# Altium PCB PCB1.PcbDoc
Units mil, origin at the board's own origin, x right, y up, seen from the top; angles counter-clockwise.
Board outline 1455.02 x 1421.26 mil, 2 copper layers (Top Layer, Bottom Layer); 13 components, 7 nets, 33 pads, 36 vias.
Unrouted connection lines stored in the file: 2.
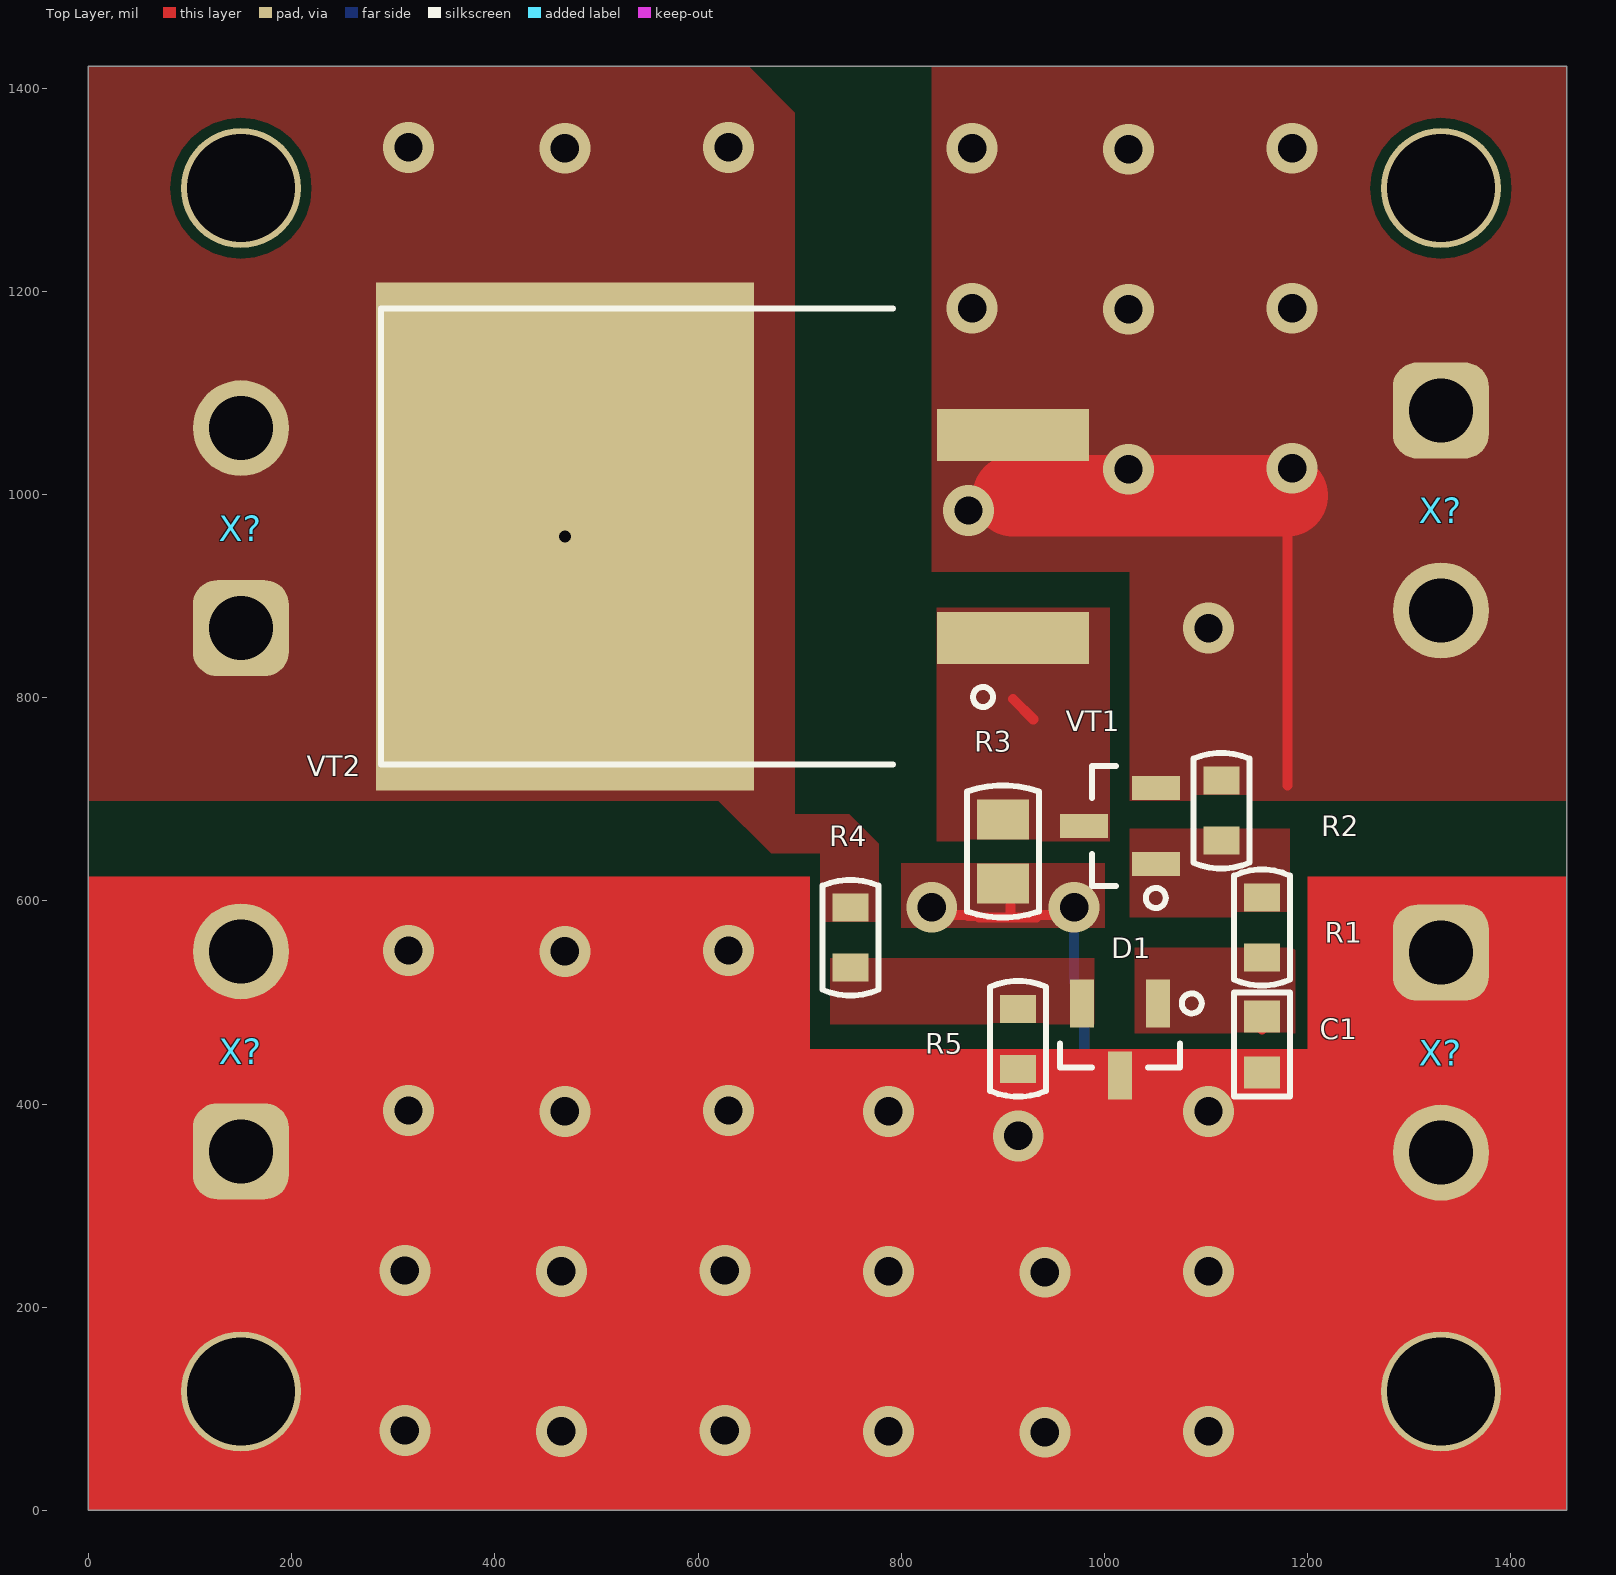
[diagram p0: Top Layer view]
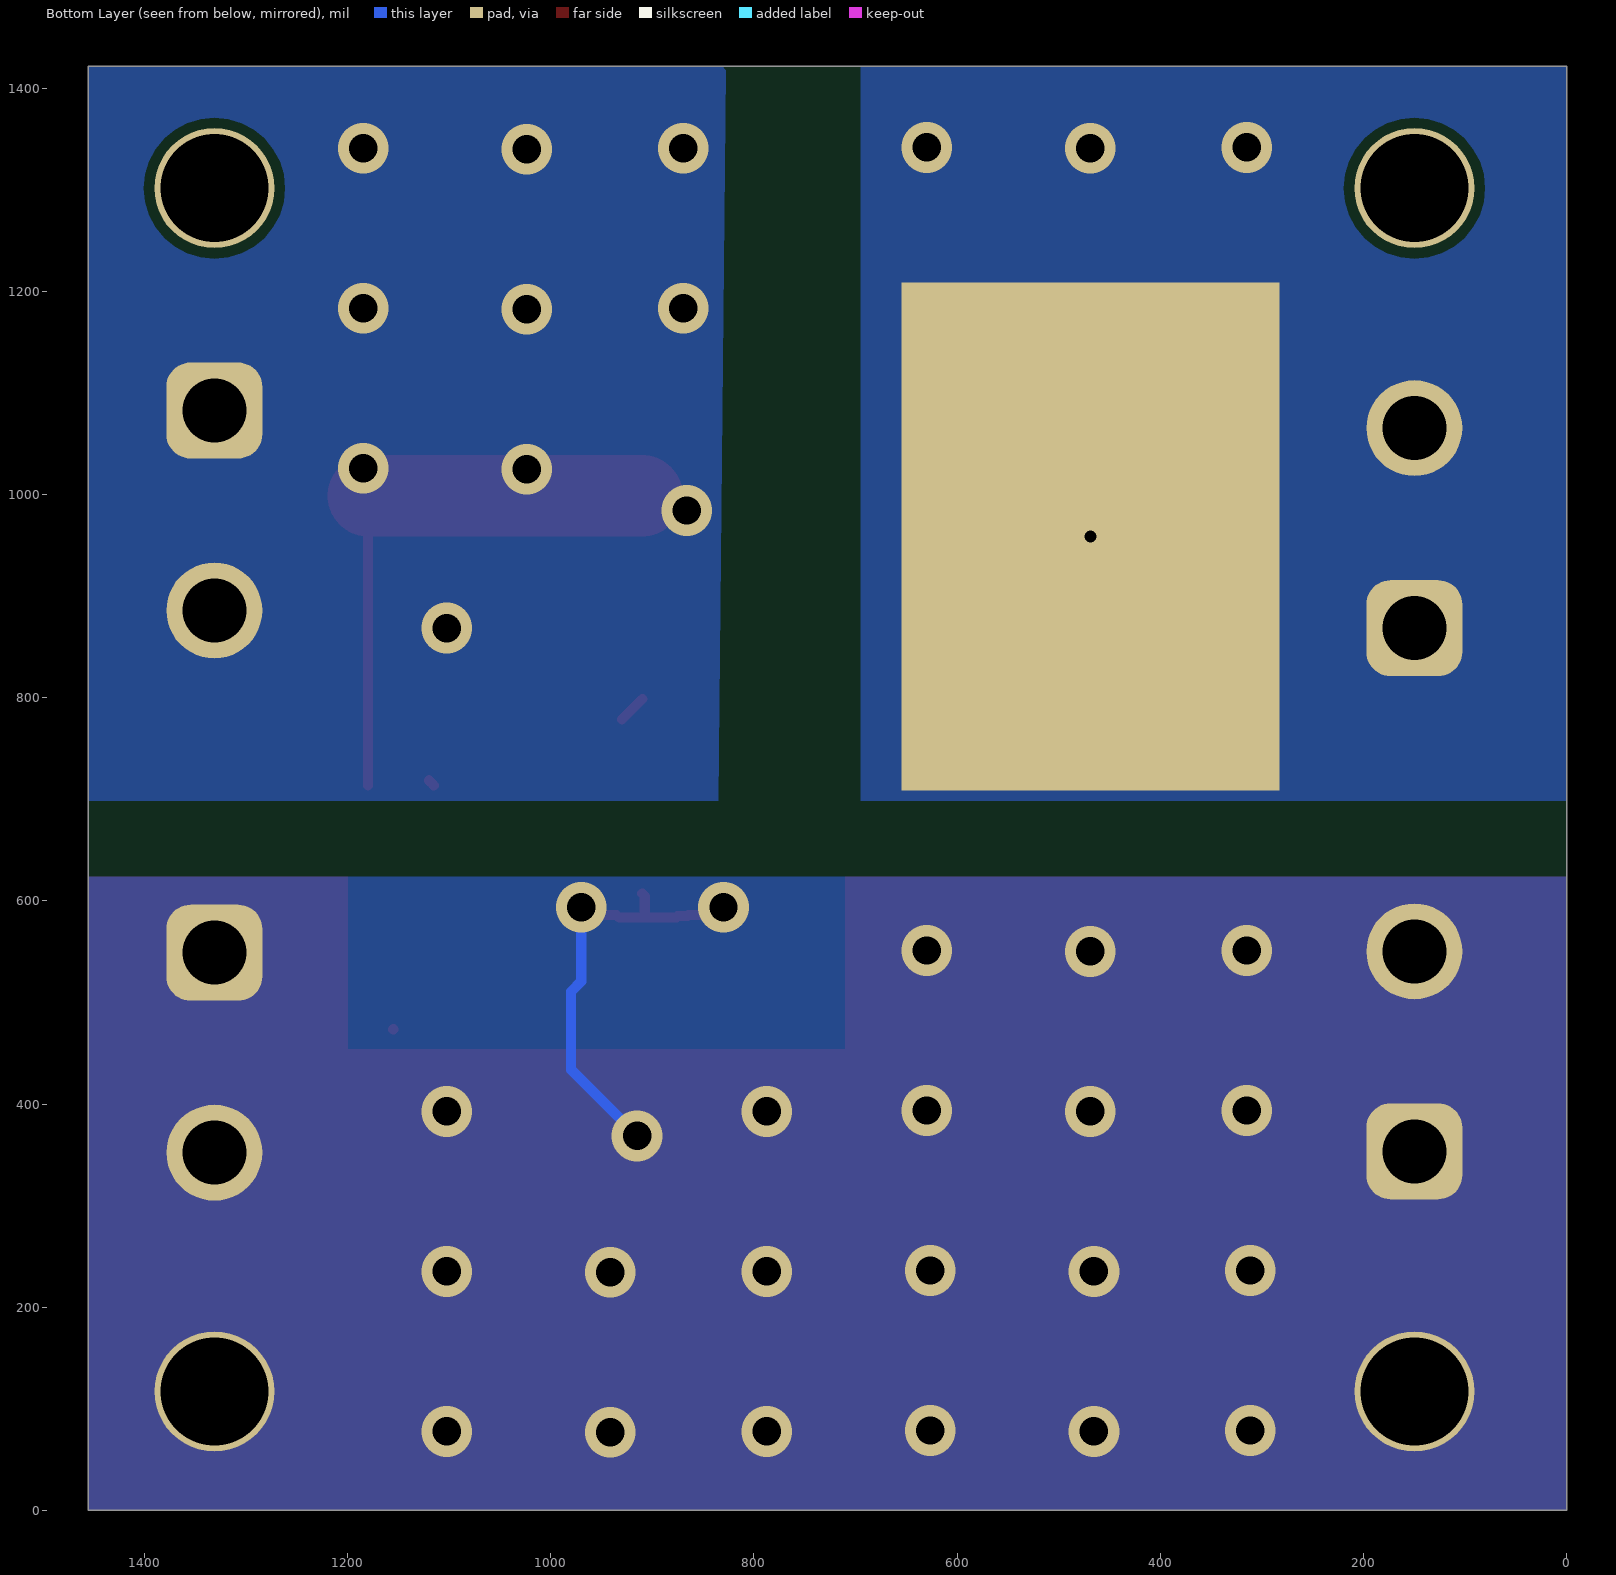
[diagram p1: Bottom Layer view, seen from below]

## Layer stack, top to bottom
Top Solder: solder mask 0.4, Solder Resist, Dk 3.5
Top Layer: signal copper 1.4
Dielectric 1: dielectric 12.6, FR-4, Dk 4.8
Bottom Layer: signal copper 1.4
Bottom Solder: solder mask 0.4, Solder Resist, Dk 3.5

## Board outline
-0.02,1421.26 1455,1421.26 1455,0 -0.02,0

## Design rules (kind name [scope] priority, off if disabled: settings)
Clearance [All] p1: gap=10 ignorepadtopadclearanceinfootprint=FALSE except(0: Arc-Hole Track-Hole SMDPad-Hole THPad-Hole Via-Hole Fill-Hole Poly-Hole Region-Hole Text-Hole)
PlaneConnect [All] p1: planeconnectstyle=Direct reliefexpansion=20 reliefentries=4 reliefconductorwidth=10 reliefairgap=10
PolygonConnect [All] p1: connectstyle=Direct reliefconductorwidth=10 reliefentries=4 polygonreliefangle="90 Angle" airgapwidth=10
RoutingVias [All] p1: holewidth=28 width=50 viastyle="Through Hole" minholewidth=28 minwidth=50 maxholewidth=28 maxwidth=50
SolderMaskExpansion [All] p1: expansion=4
Width [All] p1: maxlimit=10 minlimit=10 preferedwidth=10
29 further rules are at their usual default settings.

## Classes and differential pairs
component class USTRZ: C1 D1 R1 R2 R3 R4 R5 VT1 VT2 X?

## Components (designator, comment, footprint, x,y, rotation, side; value= is the part's Value field where it differs from the comment)
C1 "0,1 мк" CAPC1608L 1155,458.74 r90 top
D1 "TL431BIDBZR" SOT23-3L 1015,463.74 r270 top
R1 "2 к" RESC1608L 1155,573.74 r90 top
R2 "10 к" RESC1608L 1115,688.74 r90 top
R3 "4.7 k" RESC2012L 900,648.74 r90 top value={Value}
R4 "10 к" RESC1608L 750,563.74 r90 top
R5 "2,4 к" RESC1608L 915,464.21 r90 top
VT1 "" SOT23-3L 1015,673.74 r180 top
VT2 "AUIRF5210S" TO-263AB 590,958.74 r180 top
X? "2edg2" 2edg2 1331.1,787.4 r270 top
X? "2edg2" 2edg2 150,1163.74 r90 top
X? "2edg2" 2edg2 150,648.74 r90 top
X? "2edg2" 2edg2 1331.1,253.74 r270 top

## Footprints (in the part's own frame and the unit in brackets; to place one, negate y for a bottom-side part, rotate by r counter-clockwise, add the part's x,y. Pads: shape width x height; smd on the part's side, far side on the other; paste and mask are expansions set on the pad)
2edg2 [mm] "Угловой разъемный клеммник"
  rrect50% 2.4x2.4 hole 1.6: 1(-7.5,0)
  round 2.4 hole 1.6: 2(-2.5,0)
CAPC1608L [mm] "Chip Capacitor, Body 1.6x0.8mm, IPC High Density"
  rect 0.8x0.9 smd: 1(-0.7,0) 2(0.7,0)
  Top Layer pour cut-out: -0.3,0.7 -0.3,-0.7 0.3,-0.7 0.3,0.7
  silkscreen extent -1.3,-0.7 1.3,0.7, body extent -0.87,-0.48 0.87,0.48, height 0.85
RESC1608L [mm] "Chip Resistor, Body 1.6x0.8mm, IPC High Density"
  rect 0.7x0.9 smd: 1(-0.75,0) 2(0.75,0)
  Top Layer pour cut-out: -0.4,0.7 -0.4,-0.7 0.4,-0.7 0.4,0.7
  silkscreen extent -1.45,-0.7 1.45,0.7, body extent -0.85,-0.48 0.85,0.48, height 0.6
RESC2012L [mm] "Chip Resistor, Body 2.0x1.3mm, IPC High Density"
  rect 1x1.3 smd: 1(-0.8,0) 2(0.8,0)
  Top Layer pour cut-out: -0.3,0.9 -0.3,-0.9 0.3,-0.9 0.3,0.9
  silkscreen extent -1.65,-0.9 1.65,0.9, body extent -1.07,-0.7 1.07,0.7, height 0.65
SOT23-3L [mm] "SOT23, 3-Leads, Body 2.9x1.3mm, Pitch 0.95mm, Lead Span 2.5mm, IPC High Density"
  rect 1.2x0.6 smd: 1(-0.9,0.95) 2(-0.9,-0.95) 3(0.9,0)
  silkscreen extent -1.15,-1.5 0.7,2.05, body extent -1.2,-1.45 1.1,1.45, height 1
TO-263AB [mm] "D2-PAK, 3-Pads, Body 9.65x10.67mm (max), IPC Medium Density"
  rect 3.8x1.3 smd paste-0.1 mask+0.05: 1(-8.125,2.54) 3(-8.125,-2.54)
  rect 9.45x12.7 hole 0.3 paste-10: 4(3.075,0)
  silkscreen extent -7.62,-5.7 7.68,5.7, body extent -8.7,-5.32 6.54,5.33, height 5.23

## Part data
C1: library part i6124B5A087687000006, "Чип-конденсатор", ManufacturerPartNumber="GRM188R72A104KA35* Murata", Power/Voltage="100 В", Tolerance="±10 %", ImKey=i6124B5A087687000006, Name=0603, PCADLibrary=PASSIV.LIB, PCADPattern=C0603, PCADSymbol=C, PCADType=C0603, TKE/TKC=X7R, Type=Конденсатор
D1: library part TL431, "Микросхема", Manufacturer*="Texas Instruments", Package="SOT-23 (DBZ R-PDSO-G3)", ManufacturerPartNumber=TL431BIDBZR, Type=Микросхема
R1: library part i6124B5A087698000051, "Чип-резистор", ManufacturerPartNumber="RC0603F*-**2KL Yageo", Tolerance="±1 %", ImKey=i6124B5A087698000051, Name=0603, PCADLibrary=PASSIV.LIB, PCADPattern=R0603, PCADSymbol=R, PCADType=R0603, Type=Резистор
R2 R4: library part i6124B5A087698000062, "Чип-резистор", ManufacturerPartNumber="RC0603F*-**10KL Yageo", Tolerance="±1 %", ImKey=i6124B5A087698000062, Name=0603, PCADLibrary=PASSIV.LIB, PCADPattern=R0603, PCADSymbol=R, PCADType=R0603, Type=Резистор
R3: library part R0805, "Чип-резистор", Tolerance={Tolerance}, Name=0805, Type=Резистор
R5: library part i6124B5A087698000053, "Чип-резистор", ManufacturerPartNumber="RC0603F*-**2K4L Yageo", Tolerance="±1 %", ImKey=i6124B5A087698000053, Name=0603, PCADLibrary=PASSIV.LIB, PCADPattern=R0603, PCADSymbol=R, PCADType=R0603, Type=Резистор
VT1: library part MMBT3906, "PNP general purpose transistors", Manufacturer=NXP, Package=SOT23, ManufacturerPartNumber=MMBT3906, SymAuthor="Семенов В.С.", Type=Транзистор
VT2: "P-Channel Power MOSFET", Manufacturer=Infineon, Package=D2-Pak, ManufacturerPartNumber=AUIRF5210S, SymAuthor="Пшеничный С.А.", Type=Транзистор
X? X? X? X?: "Угловой разъемный клеммник", ManufacturerPartNumber=2edg2, SymAuthor=Юдин, Type=Вилка

## Free pads (board coordinates)
  round 118.11 hole 106.3: 0(150,117.24) 0(150,1301.5) 0(1331.1,117.24) 0(1331.1,1301.5)

## Via types
v1: diameter 50, hole 28, Top Layer to Bottom Layer, 36 vias

## Nets (pads, with @x,y where several pads share a name; then routed paths per layer and width w, separated by ;. In a path a pad name is that pad's centre, name@x,y a point inside that pad or via, vN(x,y) a via of type N, cw(c..) or ccw(c..) an arc to the next point about the centre after c; other vN are vias at no path point)
GND: C1.1 D1.3 pad.0 R3.1 R5.1 X?.1@150,353.46 X?.1@1331.1,549.02 X?.2@150,550.32 X?.2@1331.1,352.17 | length 428.9
  Top Layer w10: v1(830,593.74) 837.65,586.09 864.67,586.09 865.55,585.2 875.1,585.2 876.57,583.74 907.5,583.74 ; R3.1@910,607.24 907.5,604.74 907.5,583.74 ; v1(970,593.74) 962.35,586.09 935.33,586.09 932.98,583.74 907.5,583.74
  Bottom Layer w10: v1(915,368.74) 980,433.74 980,510.83 970,520.83 v1(970,593.74)
  other v1: 941.38,77.01 465.43,77.87 787.4,77.87 1102.36,77.87 311.46,78.74 626.42,78.74 941.38,234.49 311.46,236.22 465.43,235.35 626.42,236.22 787.4,235.35 1102.36,235.35 468.94,392.83 787.4,392.83 1102.36,392.83 314.96,393.7 629.92,393.7 314.96,551.18 468.94,550.32 629.92,551.18
IN11: R2.2 VT1.2 VT2.3 X?.1@1331.1,1082.68 X?.2@1331.1,885.83 | length 562.5
  Top Layer w10: R2.2@1115.24,713.5 1115,713.74 R2.2@1120,718.74 ; 1180,713.74 1180,998.74
  Top Layer w80: 909.88,998.74 1180,998.74
  other v1: 866.14,984.25 1023.62,1024.92 1184.61,1025.79
NetC1_2: C1.2 D1.1 R1.1 | length 0
NetD1_2: D1.2 R4.1 R5.2
NetR1_2: R1.2 R2.1 VT1.1
NetR3_2: R3.2 VT1.3 VT2.1 | length 28.3
  Top Layer w10: 909.88,798.74 929.88,778.74
OUT1: R4.2 VT2.4 X?.1@150,868.46 X?.2@150,1065.32
copper on no net:
  other v1: 1102.36,868.46 1023.62,1182.4 869.65,1183.27 1184.61,1183.27 1023.62,1339.88 468.94,1340.75 869.65,1340.75 1184.61,1340.75 314.96,1341.61 629.92,1341.61

## Polygon pours and split planes (outlines as drawn)
GND on Top Layer "NONET_L01_P-001" (solid, pour order 9): 800,636.93 1000,636.93 1000,573.74 800,573.74
NetD1_2 on Top Layer "NONET_L01_P-001" (solid, pour order 7): 730,543.74 990,543.74 990,478.74 730,478.74
NetC1_2 on Top Layer "NONET_L01_P-001" (solid, pour order 6): 1030,553.74 1185,553.74 1187.56,551.18 1187.56,469.49 1030,469.49
NetR1_2 on Top Layer "NONET_L01_P-001" (solid, pour order 5): 1025,671.18 1182.56,671.18 1182.56,583.74 1025,583.74
NetR3_2 on Top Layer "NONET_L01_P-001" (solid, pour order 4): 835,888.74 835,658.74 1005,658.74 1005,888.74
IN11 on Top Layer "NONET_L01_P-001" (solid, pour order 3): 830,1421.26 830,923.74 1025,923.74 1025,698.74 1455,698.74 1455,1421.26
OUT1 on Top Layer "NONET_L01_P-001" (solid, pour order 10): 0,1421.26 649.61,1421.26 695,1375.87 695,685.04 748.7,685.04 777.56,656.18 777.56,579.49 722.44,579.49 720,581.93 720,646.65 672.09,646.65 620,698.74 0,698.74
GND on Bottom Layer "NONET_L01_P-001" (solid, pour order 11): 0,623.74 1455,623.74 1455,0 0,0
IN11 on Bottom Layer "NONET_L01_P-001" (solid, pour order 12): 827.55,1421.26 1455,1421.26 1455,698.74 835,698.74
OUT1 on Bottom Layer "NONET_L01_P-001" (solid, pour order 13): 0,1421.26 695,1421.26 695,698.74 0,698.74

## Other copper
Top Layer:
  region net GND: 0,623.74 0,0 1455,0 1455,623.74 1200,623.74 1200,453.74 710,453.74 710,623.74
  text "117.24mil" at 915,368.74 h60

## Silkscreen, mask and mechanical layers (free items; w line width, h text height)
Mechanical 1:
  the board outline again, w47.24